# Altium PCB AS5600.PcbDoc
Units mil, origin at the board's own origin, x right, y up, seen from the top; angles counter-clockwise.
Board outline 1338.58 x 1338.58 mil, 2 copper layers (Top Layer, Bottom Layer); 12 components, 7 nets, 31 pads, 49 vias.
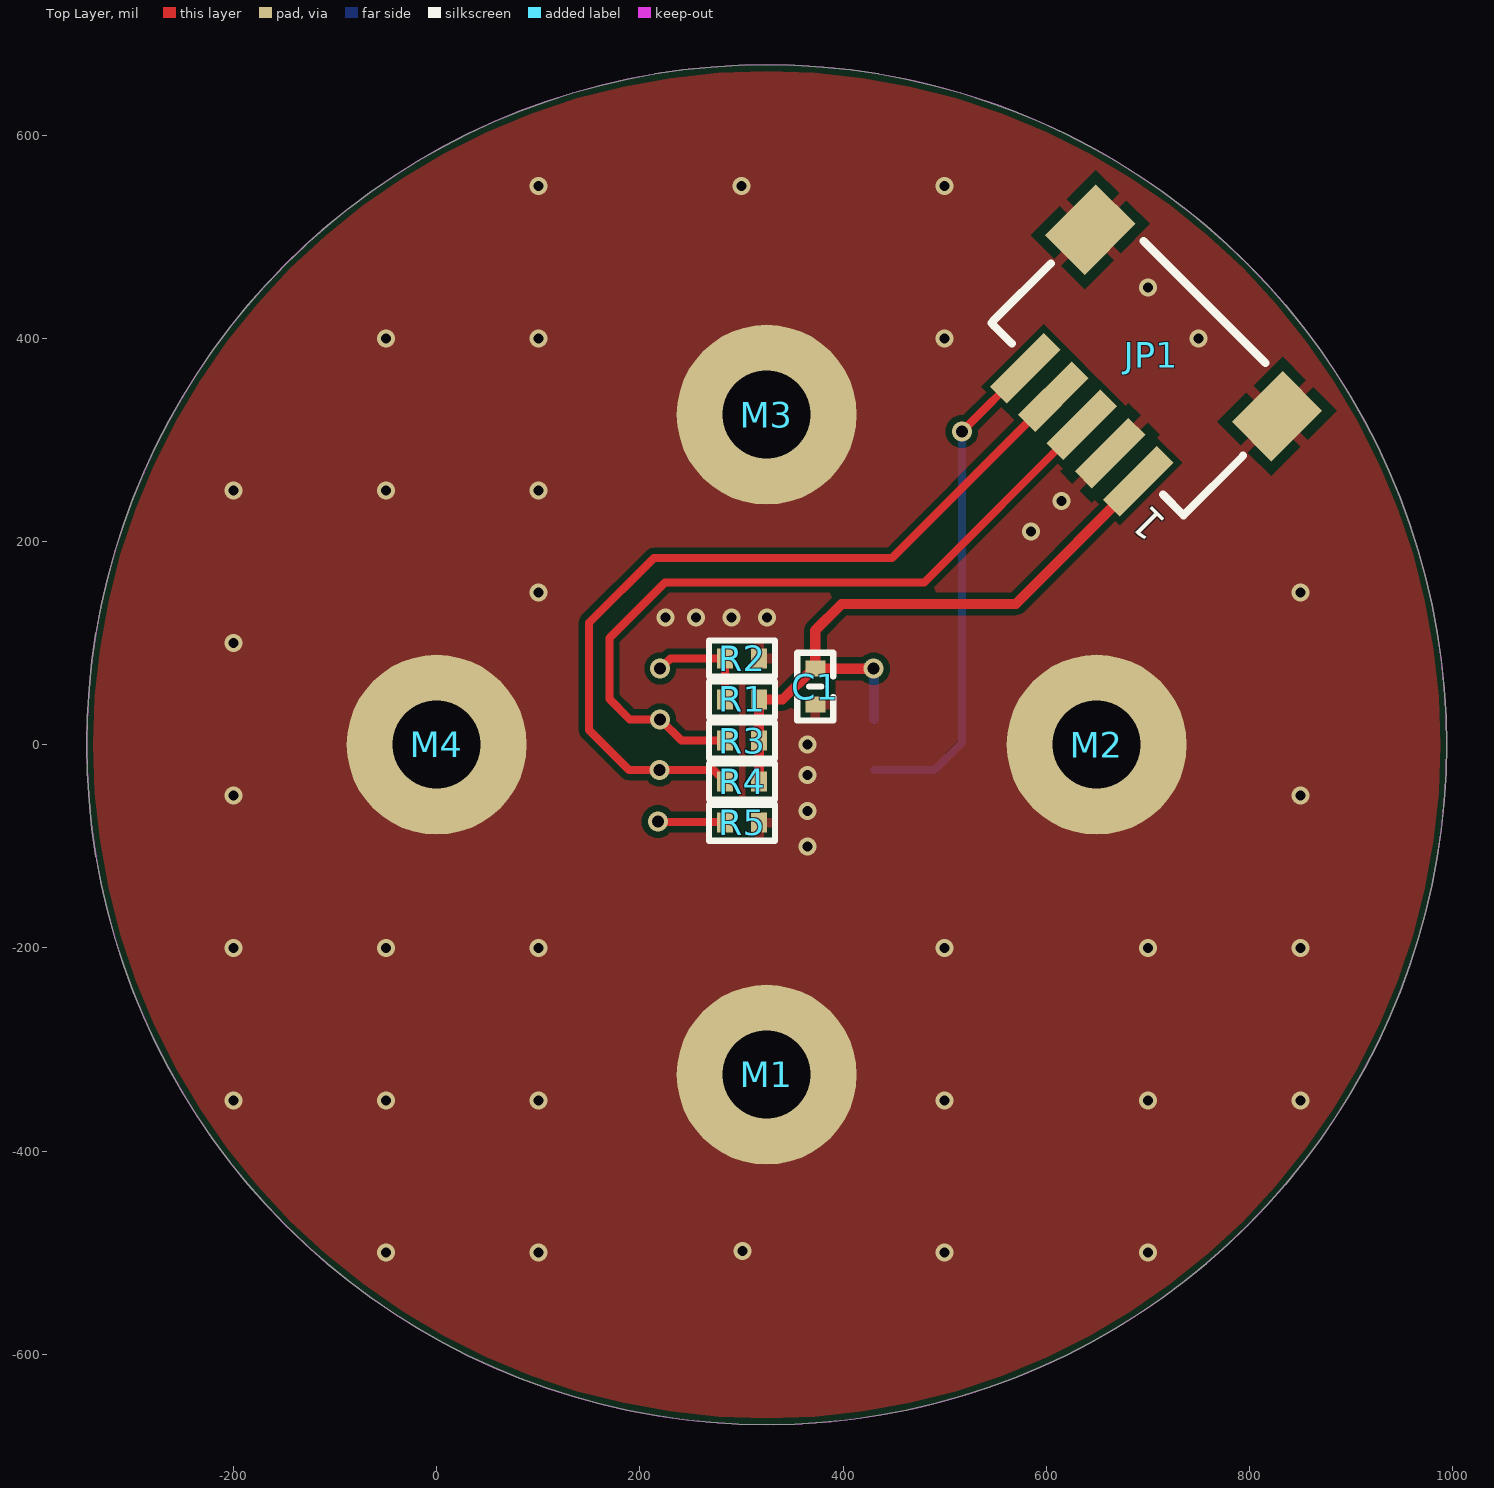
[diagram p0: Top Layer view]
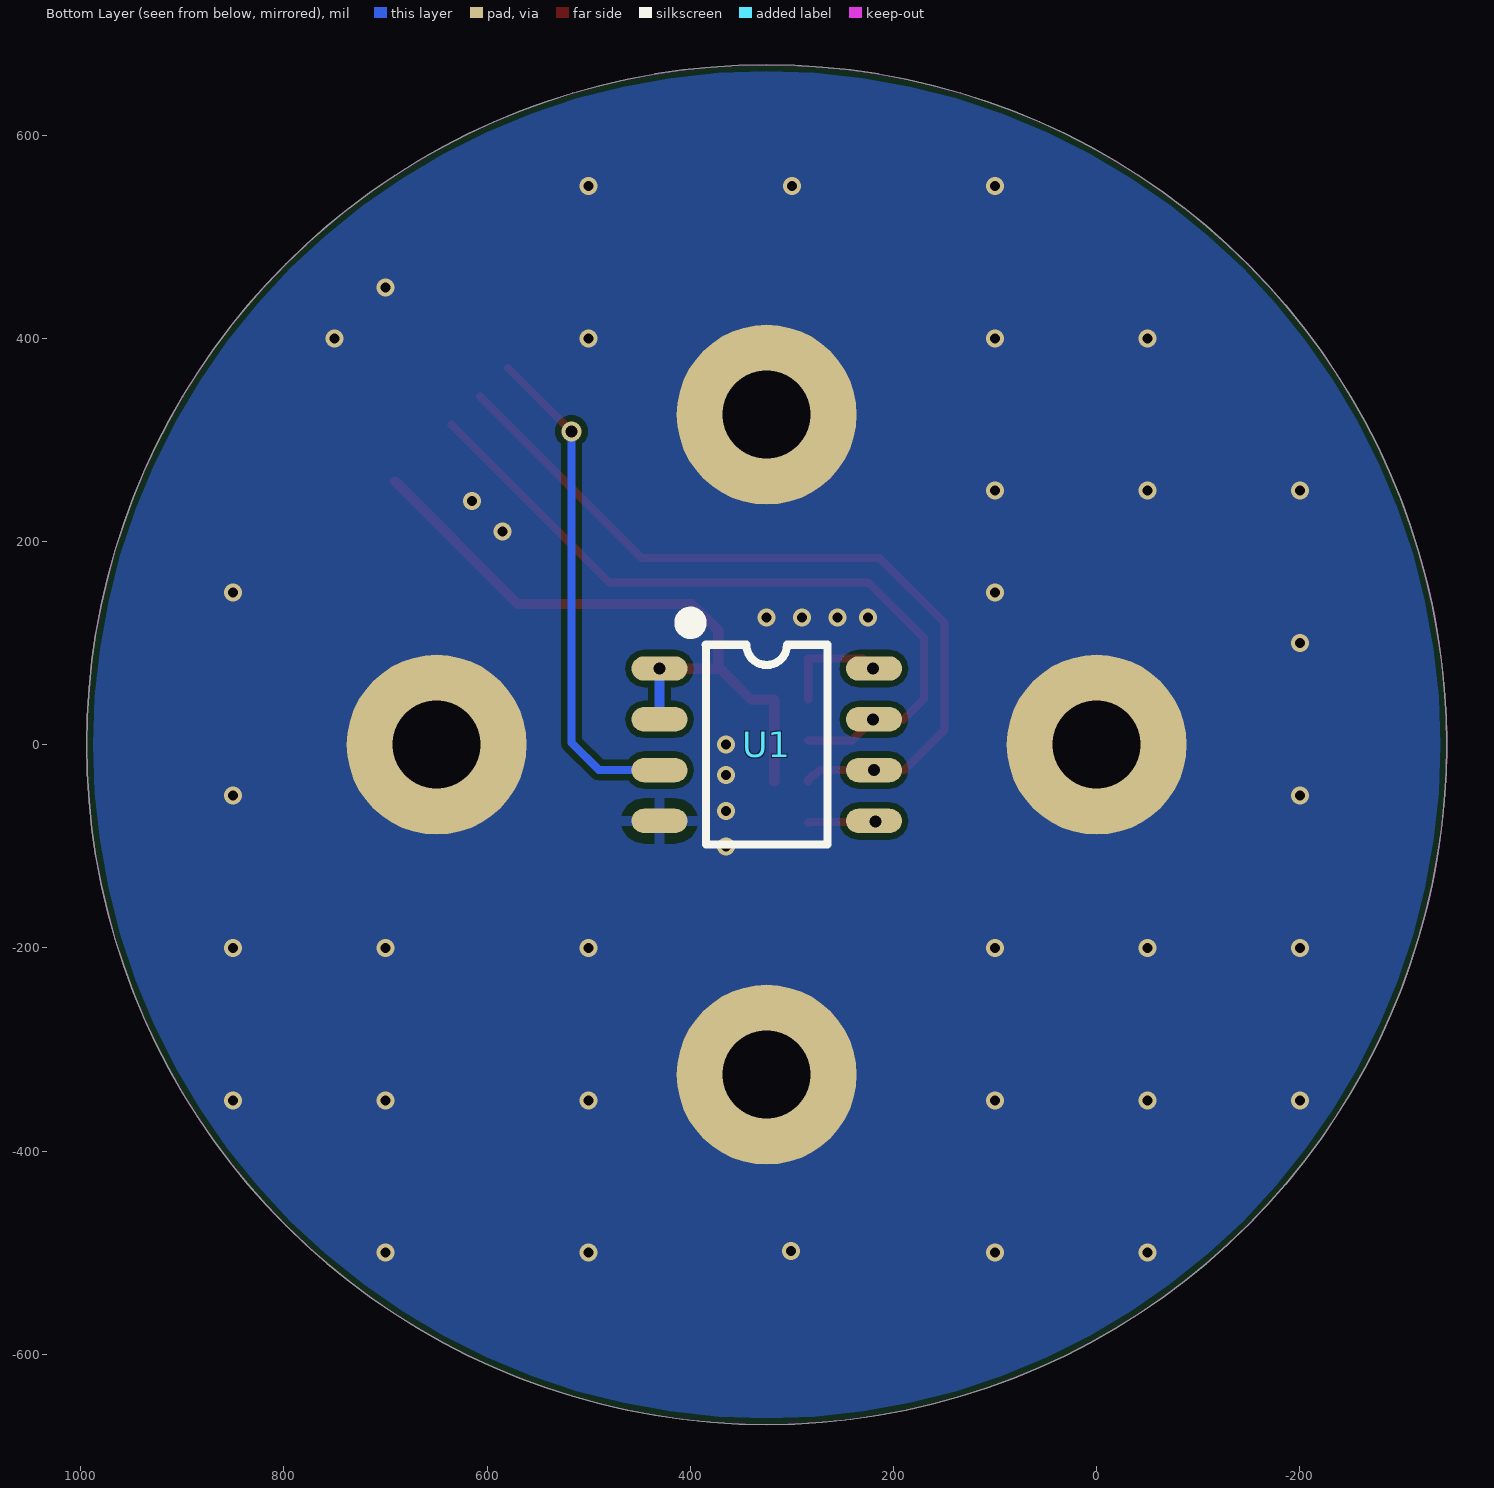
[diagram p1: Bottom Layer view, seen from below]
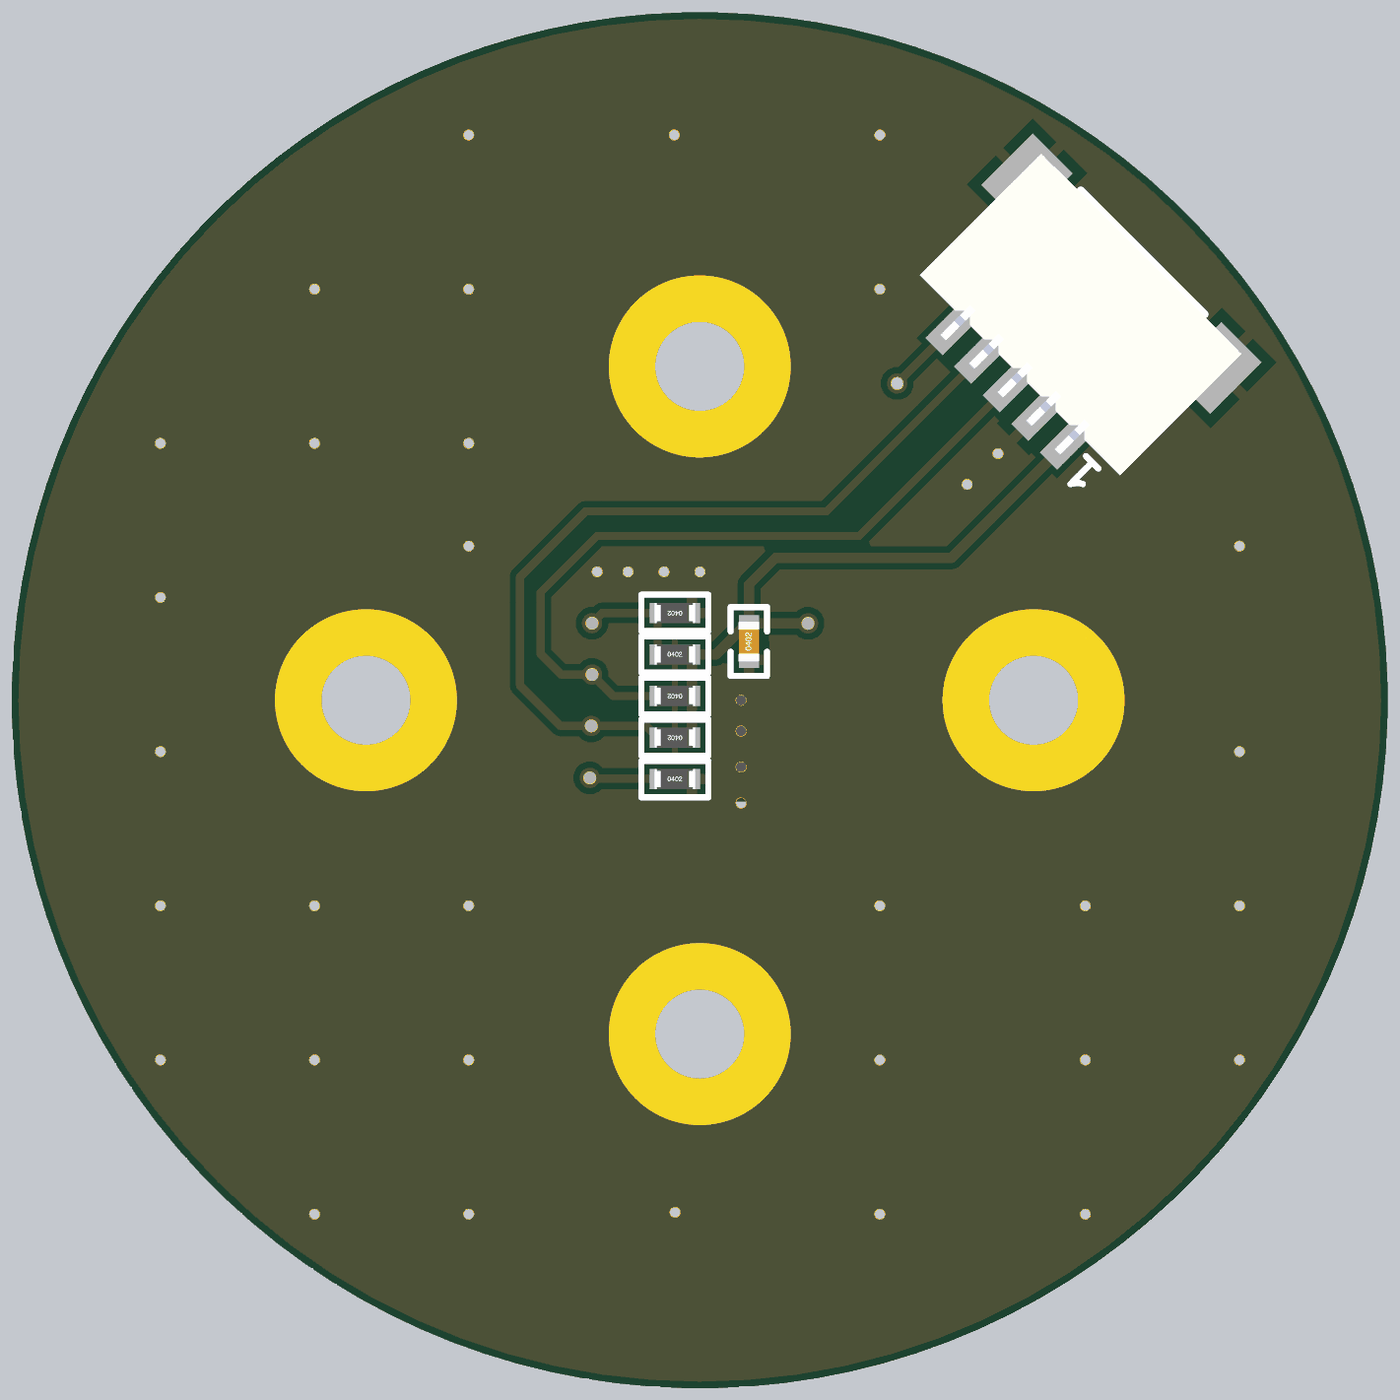
[diagram p2: 3D render of the assembled board from above, using the file's embedded part models]

## Layer stack, top to bottom
Top Solder: solder mask 0.4, Solder Resist, Dk 3.5
Top Layer: signal copper 1.4
Dielectric 1: dielectric 12.6, FR-4, Dk 4.8
Bottom Layer: signal copper 1.4
Bottom Solder: solder mask 0.4, Solder Resist, Dk 3.5

## Board outline
-344.49,0 ccw(c324.8,0) 324.8,-669.29 ccw(c324.8,0) 994.09,0 ccw(c324.8,0) 324.8,669.29 ccw(c324.8,0)

## Design rules (kind name [scope] priority, off if disabled: settings)
Clearance [All] p1: gap=6 ignorepadtopadclearanceinfootprint=FALSE
HoleToHoleClearance [All] p1: gap=0 allowstackedmicrovias=TRUE
MinimumSolderMaskSliver [All] p1: minsoldermaskwidth=0
PolygonConnect M2.5 [HasFootprint('M2焊盘')] p1: connectstyle=Direct reliefconductorwidth=10 reliefentries=4 polygonreliefangle="90 Angle" airgapwidth=10
PolygonConnect [All] p2: thpad.connectstyle=Relief thpad.reliefconductorwidth=10 thpad.reliefentries=4 thpad.polygonreliefangle="90 Angle" thpad.airgapwidth=10 smdpad.connectstyle=Relief smdpad.reliefconductorwidth=10 smdpad.reliefentries=4 smdpad.polygonreliefangle="90 Angle" smdpad.airgapwidth=10 via.connectstyle=Direct via.reliefconductorwidth=10 via.reliefentries=4 via.polygonreliefangle="90 Angle" via.airgapwidth=10
RoutingVias [All] p1: holewidth=9.84 width=17.72 viastyle="Through Hole" minholewidth=9.84 minwidth=17.72 maxholewidth=23.62 maxwidth=31.5
SilkToSilkClearance [All] p1: silktosilkclearance=0
SilkToSolderMaskClearance [IsPad] p1: minsilkscreentomaskgap=0 clearancetoexposedcopper=TRUE
SolderMaskExpansion [IsVia] p1: expansion=4 istentingtop=TRUE useseparateexpansions=TRUE expansionbottom=4 istentingbottom=TRUE
Width [All] p1: maxlimit=30 minlimit=6 preferedwidth=6
26 further rules are at their usual default settings.

## Components (designator, comment, footprint, x,y, rotation, side; value= is the part's Value field where it differs from the comment)
C1 "0.1uF" C0402_L 372.57,57.11 r90 top
JP1 "CON-5P" SH1.0-WT-5P 685,365 r135 top
M1 "M2.5" M2焊盘 324.8,-324.8 r0 top
M2 "M2.5" M2焊盘 649.61,0 r0 top
M3 "M2.5" M2焊盘 324.8,324.8 r0 top
M4 "M2.5" M2焊盘 0,0 r0 top
R1 "NC" R0402_L 300.6,44.56 r0 top
R2 "NC" R0402_L 300.6,85 r180 top
R3 "4.7K" R0402_L 300.6,4.12 r180 top
R4 "4.7K" R0402_L 300.6,-36.32 r180 top
R5 "4.7K" R0402_L 300.6,-76.76 r0 top
U1 "AS5600" SOIC-8L 324.8,0 r180 bottom locked

## Footprints (in the part's own frame and the unit in brackets; to place one, negate y for a bottom-side part, rotate by r counter-clockwise, add the part's x,y. Pads: shape width x height; smd on the part's side, far side on the other; paste and mask are expansions set on the pad)
C0402_L [mm] "无极性贴片电容"
  rect 0.4x0.5 smd: 1(-0.45,0) 2(0.45,0)
  silkscreen extent -0.85,-0.45 0.85,0.45, body extent -0.5,-0.26 0.5,0.26, height 0.54
M2焊盘 [mm]
  round 4.5 hole 2.2: 1(0,0)
R0402_L [mm] "1/16W贴片电阻"
  rect 0.4x0.5 smd: 1(-0.425,0) 2(0.425,0)
  silkscreen extent -0.82,-0.45 0.83,0.45, body extent -0.5,-0.25 0.5,0.25, height 0.3
SH1.0-WT-5P [mm] "SH1.0连接器-卧贴-5P      来自淘宝卖家ID：黄晶宝石"
  rect 1.4x1.8 smd: 0(-3.3,-1.8) 0(3.3,-1.8)
  rect 0.6x1.9 smd: 1(-2,1.8) 2(-1,1.8) 3(0,1.8) 4(1,1.8) 5(2,1.8)
  silkscreen extent -3.4,-2.54 3.4,1.6, body extent -3.5,-2.5 3.5,2.45, height 2.9
SOIC-8L [mm] "封装库来自淘宝卖家 ID：黄晶宝石，其他均为盗版"
  oval 1.397x0.61 smd: 1(-2.68,1.905) 2(-2.68,0.635) 3(-2.68,-0.635) 4(-2.68,-1.905) 5(2.68,-1.905) 6(2.68,-0.635) 7(2.68,0.635) 8(2.68,1.905)
  silkscreen extent -2.06,-2.5 1.52,3.2, body extent -3,-2.5 3,2.5, height 1.9

## Part data
C1: library part C, "贴片电容", BOM名称=无极性贴片电容, 联系卖家，免费查找封装=唯一出售店铺网址https://shop463601444.taobao.com
JP1: library part "Header 5", "5P连接器", BOM名称=5P连接器, 联系卖家 免费技术支持=封装库来自淘宝卖家ID：黄晶宝石, 联系卖家 免费查找封装=唯一出售店铺网址https://shop463601444.taobao.com
M1 M2 M3 M4: library part M2系列, "M2孔支撑柱"
R1 R2 R3 R4 R5: library part R, "贴片电阻", BOM名称=贴片电阻, 联系卖家，免费查找封装=唯一出售店铺网址https://shop463601444.taobao.com
U1: "12bit 磁编码器"

## Via types
v1: diameter 17.72, hole 9.84, Top Layer to Bottom Layer, tented both sides, 43 vias
v2: diameter 19.68, hole 11.81, Top Layer to Bottom Layer, tented both sides, 6 vias

## Nets (pads, with @x,y where several pads share a name; then routed paths per layer and width w, separated by ;. In a path a pad name is that pad's centre, name@x,y a point inside that pad or via, vN(x,y) a via of type N, cw(c..) or ccw(c..) an arc to the next point about the centre after c; other vN are vias at no path point)
AS5600_OUT: JP1.5 U1.3 | length 492.2
  Top Layer w8: v2(516.89,308.25) JP1.5
  Bottom Layer w8: U1.3 490,-25 516.89,1.89 v2(516.89,308.25)
AS5600_SCL: JP1.3 R3.2 U1.7 | length 743.3
  Top Layer w8: R3.2 240.88,4.12 v2(220,25) 190,25 170,45 170,105 224.83,159.83 479.83,159.83 JP1.3
  Bottom Layer w8: U1.7 v2(220,25)
AS5600_SDA: JP1.4 R4.2 U1.6 | length 811
  Top Layer w8: R4.2 283.87,-34.35 279.99,-30.47 278.02,-30.47 272.55,-25 v2(219.29,-25) 189.37,-25 150,14.37 150,120 213.83,183.83 448.16,183.83 JP1.4
GND: C1.1 JP1.0 JP1.2 M1.1 M2.1 M3.1 M4.1 R2.1 R5.2 U1.4
  other v1: -50,-500 100,-500 500,-500 700,-500 300.77,-498.22 -200,-350 -50,-350 100,-350 500,-350 700,-350 850,-350 -200,-200 -50,-200 100,-200 500,-200 700,-200 850,-200 365,-100 365,-65 -200,-50 850,-50 365,-30 365,0 -200,100 225,125 255,125 290,125 325,125 100,150 850,150 585,210 615,240 -200,250 -50,250 100,250 -50,400 100,400 500,400 750,400 700,450 100,550 300,550 500,550
NetR1_1: R1.1 R2.2 U1.8 | length 109.2
  Top Layer w8: v2(220,75) 230,85 R2.2 R1.1
  Bottom Layer w8: U1.8 v2(220,75)
NetR5_1: R5.1 U1.5 | length 68.2
  Top Layer w8: v2(217.85,-75.56) 218.45,-76.16 283.27,-76.16 R5.1
  Bottom Layer w8: v2(217.85,-75.56) 218.73,-75.56 U1.5
VCC_3V3: C1.2 JP1.1 R1.2 R3.1 R4.1 U1.1 U1.2 | length 672.9
  Top Layer w10: R4.1 R3.1 R1.2 340.34,44.56 370.6,74.82 C1.2 ; v2(430.14,74.82) C1.2 ; JP1.1 569.91,138.56 398.56,138.56 372.57,112.57 C1.2
  Bottom Layer w10: U1.2 430.32,74.64 v2(430.14,74.82) U1.1

## Polygon pours and split planes (outlines as drawn)
GND on Top Layer "GND_L01_P000" (solid, remove dead copper, pour order 0): -360,685 -360,-680 1015,-680 1015,685
GND on Bottom Layer "GND_L02_P001" (solid, remove dead copper, pour order 1): -360,685 -360,-680 1015,-680 1015,685

## Keep-outs
Keep-Out Layer:
  circle w0.5: c324.8,0 r669.29

## Silkscreen, mask and mechanical layers (free items; w line width, h text height)
Mechanical 1:
  circle w0.5: c324.8,0 r669.29
Mechanical 2:
  circle w0.5: c324.8,-324.8 r49.21
  circle w0.5: c649.61,0 r49.21
  circle w0.5: c0,0 r49.21
  circle w0.5: c0,0 r49.21
  circle w0.5: c324.8,324.8 r49.21
  circle w0.5: c324.8,0 r669.29
Mechanical 3:
  circle w0.25: c0,0 r0.12
  circle w0.25: c649.61,0 r0.12
  circle w0.25: c649.61,-850.5 r0.12
  circle w0.25: c324.8,324.8 r0.12
  circle w0.25: c324.8,-324.8 r0.12
  circle w0.25: c824.84,444.87 r0.12
  circle w0.25: c-175.23,-444.87 r0.12
  circle w0.25: c344.65,369.84 r0.12
  circle w0.25: c304.96,279.77 r0.12

## Text inside footprints (layer, text, board x,y; h text height)
JP1: Top Overlay "1" at 719.8,218.85 h30 r135